# EAGLE board usbbdm_v3-1 (EAGLE 5.06)
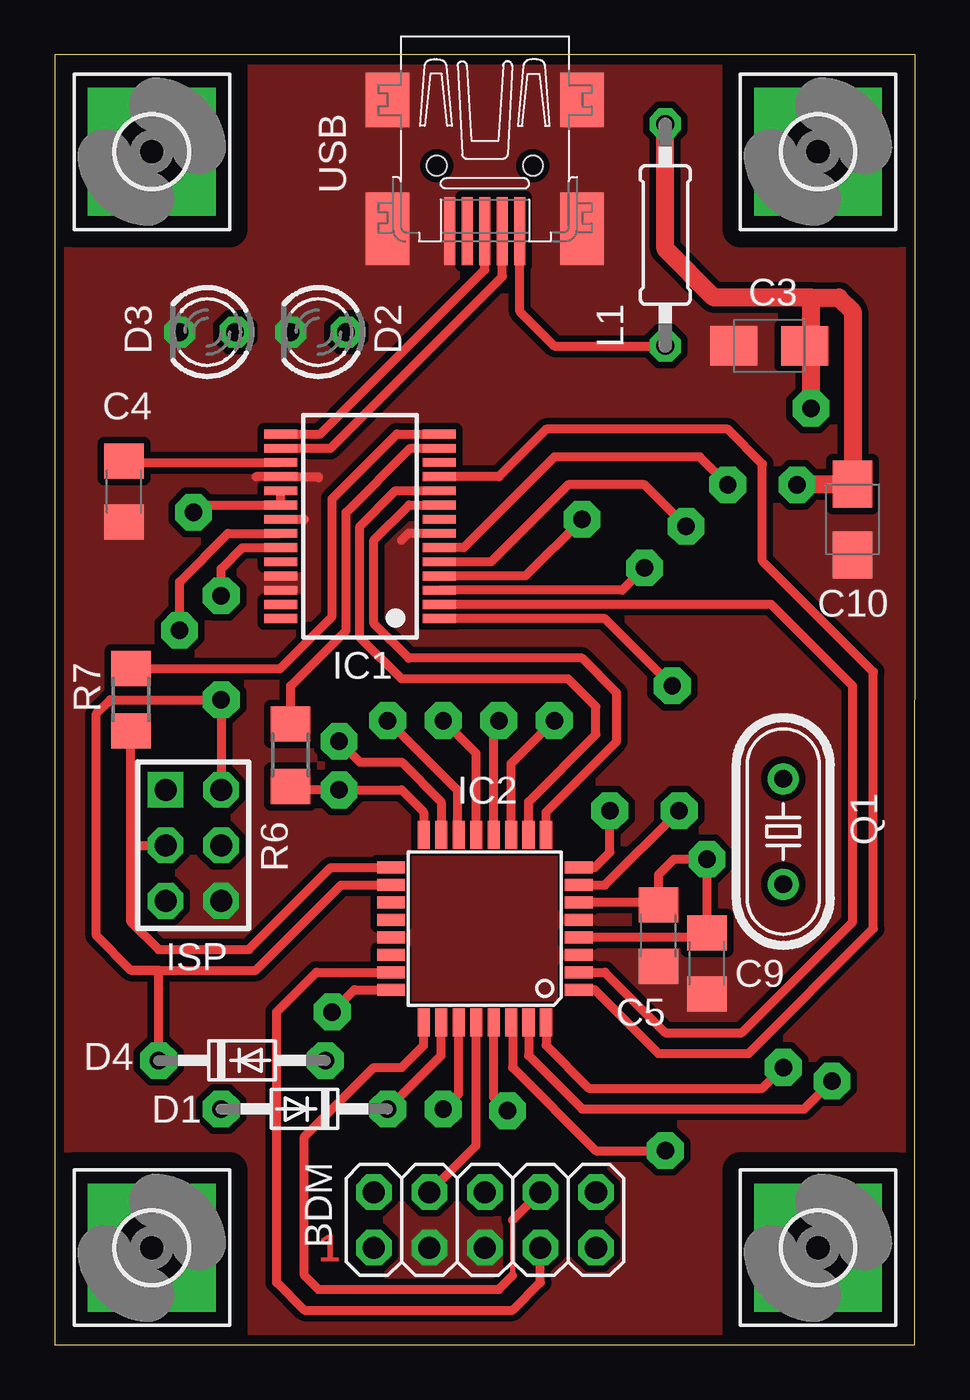
[diagram p0: board, top side]
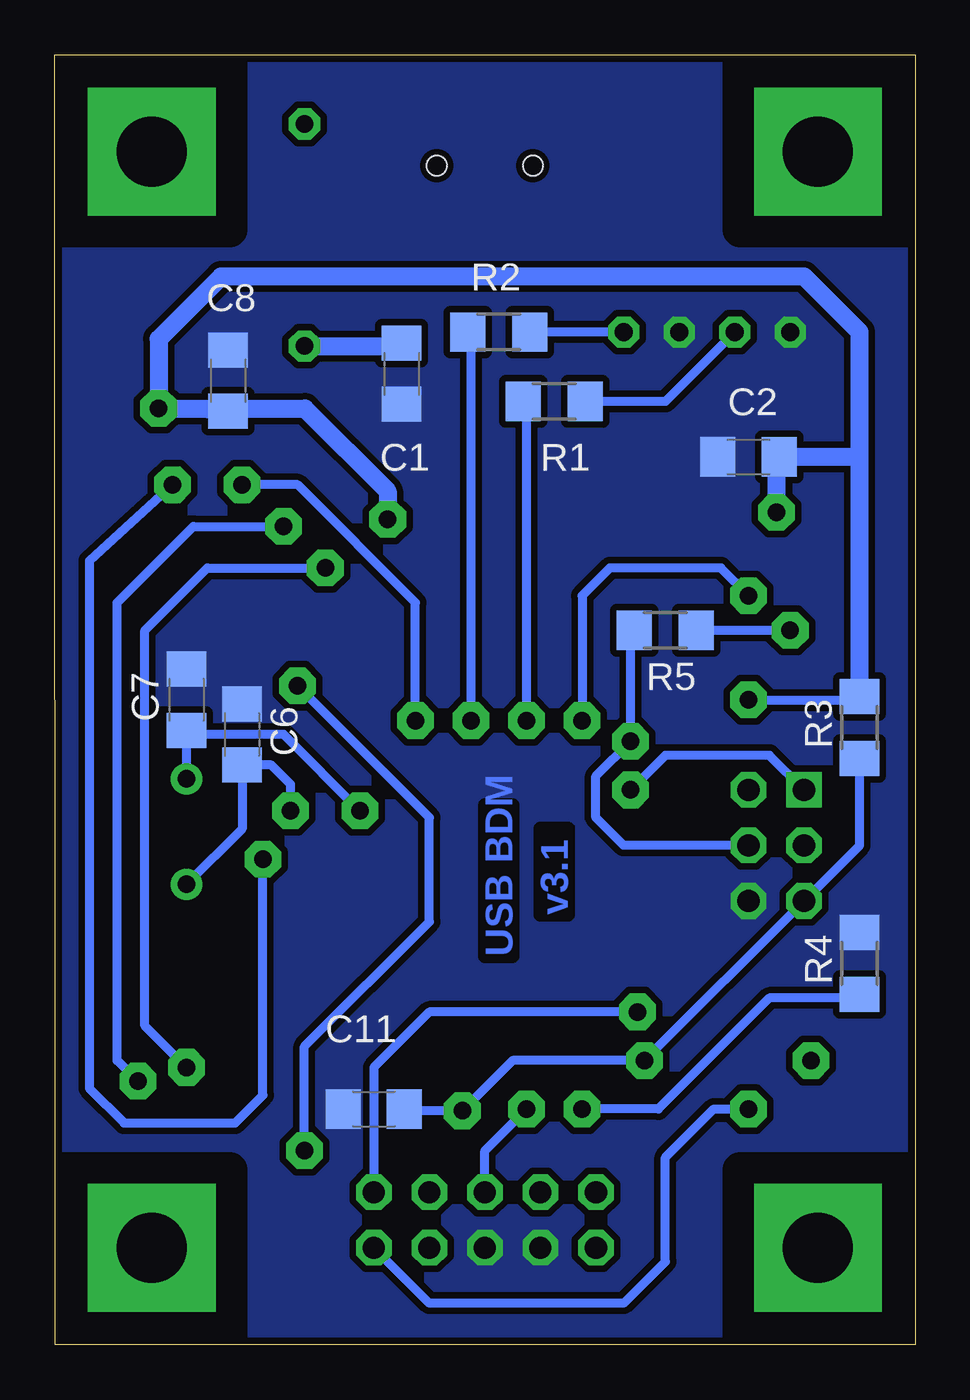
[diagram p1: board, bottom side, seen from below]

Size 39.37 x 59.05 mm. Coordinates in mm from the lower left corner, seen from the top.
Outline: 0,0 39.35,0 39.37,59.05 0,59.05 0,0
Copper layers (1*16): Top 0.035mm / dielectric 1.5mm / Bottom 0.035mm
Design rules "SparkFun": minimum track width 8mil, minimum drill 20mil, track to track 8mil, track to pad 8mil, pad to pad 8mil, via to via 8mil, smd to smd 8mil, copper to edge 10mil, drill to drill 8mil, minimum pad ring 12mil, minimum via ring 10mil, stop-mask expansion 4mil, vias tented up to drill 25mil, thermal gap 10mil

## Footprints (pad centres in the part's own frame; a part is rotated, then mirrored left to right if it is on the bottom)
C1206 = smd 1.6 x 1.8: 1 -1.4,0; 2 1.4,0
B/3528-21W = smd 2.15 x 1.8: + 1.625,0; - -1.625,0
32005-201 = smd 3.1 x 0.5: 1 3,1.6; 2 3,0.8; 3 3,0; 4 3,-0.8; 5 3,-1.6 | smd 2.5 x 2: M1 -3,-4.45; M2 -3,4.45 | smd 3.3 x 2: M3 2.9,4.45; M4 2.9,-4.45 | hole 0.9: 0,2.2; 0,-2.2
2X05 = drill 1.016 octagon: 1 -5.08,-1.27; 2 -5.08,1.27; 3 -2.54,-1.27; 4 -2.54,1.27; 5 0,-1.27; 6 0,1.27; 7 2.54,-1.27; 8 2.54,1.27; 9 5.08,-1.27; 10 5.08,1.27
AVR-ISP-6 = drill 1.016 square: 1 -2.54,-1.27 | drill 1.016 octagon: 2 -2.54,1.27; 3 0,-1.27; 4 0,1.27; 5 2.54,-1.27; 6 2.54,1.27
DO34-7 = drill 0.8 pad 1.676 octagon: A 3.81,0; C -3.81,0
LED3MM = drill 0.813 octagon: A -1.27,0; K 1.27,0
SSOP28 = smd 0.4 x 1.5: 1 -4.225,-3.625; 2 -3.575,-3.625; 3 -2.925,-3.625; 4 -2.275,-3.625; 5 -1.625,-3.625; 6 -0.975,-3.625; 7 -0.325,-3.625; 8 0.325,-3.625; 9 0.975,-3.625; 10 1.625,-3.625; 11 2.275,-3.625; 12 2.925,-3.625; 13 3.575,-3.625; 14 4.225,-3.625; 15 4.225,3.625; 16 3.575,3.625; 17 2.925,3.625; 18 2.275,3.625; 19 1.625,3.625; 20 0.975,3.625; 21 0.325,3.625; 22 -0.325,3.625; 23 -0.975,3.625; 24 -1.625,3.625; 25 -2.275,3.625; 26 -2.925,3.625; 27 -3.575,3.625; 28 -4.225,3.625
TQFP32-08 = smd 1.27 x 0.559: 1 -4.293,2.8; 2 -4.293,2; 3 -4.293,1.2; 4 -4.293,0.4; 5 -4.293,-0.4; 6 -4.293,-1.2; 7 -4.293,-2; 8 -4.293,-2.8; 17 4.293,-2.8; 18 4.293,-2; 19 4.293,-1.2; 20 4.293,-0.4; 21 4.293,0.4; 22 4.293,1.2; 23 4.293,2; 24 4.293,2.8 | smd 0.559 x 1.27: 9 -2.8,-4.293; 10 -2,-4.293; 11 -1.2,-4.293; 12 -0.4,-4.293; 13 0.4,-4.293; 14 1.2,-4.293; 15 2,-4.293; 16 2.8,-4.293; 25 2.8,4.293; 26 2,4.293; 27 1.2,4.293; 28 0.4,4.293; 29 -0.4,4.293; 30 -1.2,4.293; 31 -2,4.293; 32 -2.8,4.293
0207/10 = drill 0.813 octagon: 1 -5.08,0; 2 5.08,0
HC49/S = drill 0.813 round: 1 -2.413,0; 2 2.413,0
R1206 = smd 1.6 x 1.803: 1 -1.422,0; 2 1.422,0
3,2-PAD-SQUARE = drill 3.2 pad 5.842 square: B3,2 0,0

## Placement (x,y rotation side)
C1  10nF  [C1206]  23.5,44.45 270 bottom
C2  100nF  [C1206]  7.62,40.64 0 bottom
C3  4.7uF  [B/3528-21W]  32.7,45.72 0 top
C4  100nF  [C1206]  3.17,39.05 90 top
C5  100nF  [C1206]  27.62,18.73 90 top
C6  22pF  [C1206]  30.8,27.94 270 bottom
C7  22pF  [C1206]  33.34,29.53 270 bottom
C8  100nF  [C1206]  31.43,44.13 270 bottom
C9  100nF  [C1206]  29.85,17.46 90 top
C10  4.7uF  [B/3528-21W]  36.51,37.78 90 top
C11  10n  [C1206]  24.77,10.79 0 bottom
CON1  USB  [32005-201]  19.69,53.98 270 top
CON2  BDM  [2X05]  19.69,5.71 0 top
CON3  ISP  [AVR-ISP-6]  6.35,22.86 270 top
D1  [DO34-7]  11.43,10.79 180 top
D2  ERR  [LED3MM]  12.06,46.35 180 top
D3  ACT  [LED3MM]  6.98,46.35 180 top
D4  [DO34-7]  8.57,13.02 0 top
IC1  FT245RL  [SSOP28]  13.97,37.47 90 top
IC2  MEGA8-AI  [TQFP32-08]  19.69,19.05 180 top
L1  4.7uH  [0207/10]  27.94,50.8 90 top
Q1  16MHz  [HC49/S]  33.34,23.5 90 top
R1  270  [R1206]  16.51,43.18 0 bottom
R2  270  [R1206]  19.05,46.35 0 bottom
R3  10K  [R1206]  2.54,28.26 90 bottom
R4  10K  [R1206]  2.54,17.46 90 bottom
R5  4K7  [R1206]  11.43,32.7 180 bottom
R6  4K7  [R1206]  10.79,26.99 270 top
R7  4K7  [R1206]  3.49,29.53 270 top
U$2  [3,2-PAD-SQUARE]  4.45,4.45 0 top
U$3  [3,2-PAD-SQUARE]  34.92,4.45 0 top
U$4  [3,2-PAD-SQUARE]  4.45,54.61 0 top
U$5  [3,2-PAD-SQUARE]  34.92,54.61 0 top

## Library data of the parts
C1-C11 L1 R1-R7 = resistor
CON1 = con-cypressindustries
CON2 = pinhead
CON3 = avr-4
D1 D4 IC1 = usb_bdm
D2 D3 = led
IC2 = atmel
Q1 = crystal
U$2-U$5 = holes

## Nets
GND: C1.2 C2.1 C3.- C4.1 C5.1 C6.1 C7.1 C8.1 C9.1 C10.- C11.1 CON1.5 CON1.M1 CON1.M2 CON1.M3 CON1.M4 CON2.3 CON2.5 CON3.6 D2.K D3.K IC1.7 IC1.18 IC1.21 IC1.25 IC1.26 IC2.3 IC2.5 IC2.21 R4.2
N$1: C4.2 IC1.17
N$2: IC2.13 R1.1
N$3: CON1.3 IC1.15
N$4: CON2.7 IC2.23
N$5: CON1.2 IC1.16
N$6: CON2.10 IC2.24
N$7: CON2.8 IC2.25
N$8: D1.C IC2.26 R4.1
N$9: CON2.6 IC2.27
N$10: C11.2 CON3.5 D4.A IC2.29 R3.1
N$11: IC1.22 R5.1
N$12: CON3.1 IC2.16 R6.2
N$13: IC2.12 R2.1
N$14: D2.A R2.2
N$15: CON2.9 D1.A
N$16: IC1.14 R7.1
N$17: CON2.4 IC2.28
N$18: C1.1 CON1.1 L1.1
N$19: IC1.1 IC2.30
N$20: IC1.5 IC2.31
N$21: C6.2 IC2.7 Q1.1
N$22: C7.2 IC2.8 Q1.2
N$23: IC1.3 IC2.32
N$24: IC1.11 IC2.1
N$25: CON3.4 IC2.15 R5.2
N$26: D3.A R1.2
N$27: IC1.2 IC2.2
N$28: IC1.9 IC2.9
N$29: IC1.10 IC2.10
N$30: IC1.6 IC2.11
N$31: IC1.23 IC2.14
N$33: IC1.13 R6.1
N$34: CON3.3 IC2.17 R7.2
VCC: C2.2 C3.+ C5.2 C8.2 C9.2 C10.+ CON3.2 D4.C IC1.4 IC1.19 IC1.20 IC2.4 IC2.6 IC2.18 L1.2 R3.2

## Tracks (layer width: path | path; a pad name or v marks a point on that pad's centre or on a via)
GND
  Top 0.406: IC1.21 11.43,37.79 11.43,37.78 | 9.21,39.74 IC1.18 12.06,39.74 12.06,39.69 | IC1.7 16.19,37.14 15.88,36.83
  pour Top (isolate 0.305, no thermals): 0.64,58.42 38.73,58.42 38.73,0.64 0.64,0.64
  pour Bottom (isolate 0.305, no thermals): 0.64,58.42 38.73,58.42 38.73,0.64 0.64,0.64
  pour Bottom (isolate 0.305, no thermals): 3.81,48.9 3.81,45.09 14.61,45.09 14.61,48.9
N$1
  Top 0.406: IC1.17 3.81,40.39 C4.2
N$2  (via drill 0.8 pad 1.68)
  Top 0.406: v17.78,28.57 19.29,27.07 IC2.13
  Bottom 0.406: v17.78,28.57 17.78,43.18
  Bottom 0.61: 17.78,43.18 R1.1
N$3
  Top 0.406: IC1.15 12.16,41.69 19.69,49.21 CON1.3
N$4
  Top 0.406: IC2.23 11.97,17.05 10.16,15.24 10.16,2.86 11.43,1.59 20.96,1.59 22.23,2.86 CON2.7
N$5
  Top 0.406: CON1.2 20.49,48.9 16.35,44.77 12.63,41.04 IC1.16
N$6  (via drill 0.8 pad 1.68)
  Top 0.406: v12.7,15.24 13.71,16.25 IC2.24
  Bottom 0.406: v12.7,15.24 22.23,15.24 24.77,12.7 CON2.10
N$7
  Top 0.254: 20.96,3.17 20.96,5.71
  Top 0.406: 20.96,5.71 CON2.8 | 20.96,3.17 20.32,2.54 12.06,2.54 11.43,3.17 11.43,9.53 14.61,12.7 15.88,12.7 16.89,13.7 IC2.25
N$8
  Top 0.406: IC2.26 17.69,13.24 D1.C
  Bottom 0.406: D1.C 11.75,10.79 6.67,15.88 2.54,15.88 R4.1
N$9  (via drill 0.8 pad 1.68)
  Top 0.406: v17.78,10.79 18.49,11.5 IC2.27
  Bottom 0.406: v17.78,10.79 19.69,8.89 CON2.6
N$10  (via drill 0.8 pad 1.68)
  Top 0.406: v20.72,10.71 20.09,11.35 IC2.29
  Bottom 0.406: R3.1 2.54,22.86 CON3.5 D4.A 18.42,13.02 v20.72,10.71 23.37,10.71 C11.2
N$11  (via drill 0.8 pad 1.68)
  Top 0.406: IC1.22 7.93,37.14 5.71,34.92 v5.71,32.7
  Bottom 0.406: v5.71,32.7 R5.1 10.16,32.7
N$12  (via drill 0.8 pad 1.68)
  Top 0.406: IC2.16 16.89,24.39 15.88,25.4 v13.02,25.4 10.79,25.4 R6.2
  Bottom 0.406: v13.02,25.4 11.43,26.99 6.67,26.99 CON3.1
N$13  (via drill 0.8 pad 1.68)
  Top 0.406: v20.32,28.57 20.09,28.18 IC2.12
  Bottom 0.406: v20.32,28.57 20.32,45.67
  Bottom 0.61: 20.32,45.67 20.27,46.35 R2.1
N$14
  Bottom 0.406: D2.A R2.2
N$15
  Bottom 0.406: D1.A 9.21,10.79 11.43,8.57 11.43,3.81 13.33,1.91 22.23,1.91 CON2.9
N$16
  Top 0.406: IC1.14 15.65,41.69 12.7,38.73 12.7,33.34 10.48,31.11 10.31,30.95 R7.1
N$17
  Top 0.406: CON2.4 19.29,9.12 IC2.28
N$18
  Top 0.406: L1.1 22.86,45.72 21.29,47.3 CON1.1
  Bottom 0.406: 23.5,45.72 C1.1
  Bottom 0.813: L1.1 23.5,45.72
N$19  (via drill 0.8 pad 1.68)
  Top 0.406: IC1.1 25.18,33.24 v28.26,30.16 | IC2.30 20.96,14.76 20.96,12.7 24.77,8.89 v27.94,8.89
  Bottom 0.406: v28.26,30.16 22.23,24.13 22.23,19.37 27.94,13.65 v27.94,8.89
N$20  (via drill 0.8 pad 1.68)
  Top 0.406: v35.56,12.06 34.29,10.79 24.13,10.79 21.69,13.24 IC2.31 | v28.89,37.47 26.99,39.37 23.5,39.37 19.96,35.84 IC1.5
  Bottom 0.406: v28.89,37.47 33.02,37.47 36.51,33.97 36.51,13.02 v35.56,12.06
N$21  (via drill 0.8 pad 1.68)
  Top 0.406: IC2.7 25.18,21.05 v28.58,24.45
  Bottom 0.406: v28.58,24.45 28.58,25.66 29.46,26.54 C6.2 30.8,23.62 Q1.1
N$22  (via drill 0.8 pad 1.68)
  Top 0.406: IC2.8 24.71,21.85 25.4,22.54 v25.4,24.45
  Bottom 0.406: Q1.2 33.34,27.94 28.89,27.94 v25.4,24.45
  Bottom 0.61: 33.34,27.94 C7.2
N$23  (via drill 0.8 pad 1.68)
  Top 0.406: IC2.32 22.49,13.71 24.45,11.75 32.38,11.75 v33.34,12.7 | IC1.3 25.97,34.54 v26.99,35.56
  Bottom 0.406: v33.34,12.7 35.24,14.61 35.24,32.7 32.38,35.56 v26.99,35.56
N$24
  Top 0.406: IC1.11 20.32,39.74 22.49,41.91 30.8,41.91 32.38,40.32 32.38,35.88 37.46,30.8 37.46,19.05 31.75,13.34 27.62,13.34 24.71,16.25 IC2.1
N$25  (via drill 0.8 pad 1.68)
  Top 0.406: v13.02,27.62 13.97,26.67 15.88,26.67 17.69,24.86 IC2.15
  Bottom 0.406: R5.2 13.02,32.7 v13.02,27.62 14.61,26.04 14.61,24.13 13.33,22.86 CON3.4
N$26
  Bottom 0.406: D3.A 11.43,43.18 R1.2
N$27
  Top 0.406: IC2.2 25.18,17.05 27.94,14.29 31.43,14.29 36.51,19.37 36.51,30.16 32.78,33.89 IC1.2
N$28
  Top 0.406: IC1.9 16.21,38.44 14.61,36.83 14.61,33.02 16.19,31.43 24.13,31.43 25.72,29.84 25.72,27.62 22.49,24.39 IC2.9
N$29
  Top 0.406: IC1.10 15.6,39.09 13.97,37.47 13.97,32.38 15.88,30.48 23.5,30.48 24.77,29.21 24.77,27.94 21.69,24.86 IC2.10
N$30  (via drill 0.8 pad 1.68)
  Top 0.406: v30.8,39.37 29.53,40.64 22.86,40.64 18.71,36.49 IC1.6 | v22.86,28.57 20.89,26.6 IC2.11
  Bottom 0.406: v22.86,28.57 22.86,33.97 28.26,39.37 v30.8,39.37
N$31  (via drill 0.8 pad 1.68)
  Top 0.406: IC2.14 18.42,23.34 18.42,25.4 v15.24,28.57 | v7.62,34.29 7.62,35.52 8.6,36.49 IC1.23
  Bottom 0.406: v7.62,34.29 8.89,35.56 13.97,35.56 15.24,34.29 v15.24,28.57
N$33
  Top 0.406: R6.1 10.79,30.16 13.33,32.7 13.33,38.1 16.28,41.04 IC1.13
N$34
  Top 0.406: IC2.17 12.64,21.85 8.89,18.1 4.76,18.1 3.49,19.37 3.49,22.86 | 3.49,22.86 CON3.3 | 3.49,22.86 R7.2
VCC  (via drill 0.8 pad 1.68)
  Top 0.406: v24.13,37.78 21.54,35.19 IC1.4 | IC1.19 IC1.20 6.64,38.44 v6.35,38.1 | 7.72,25.4 CON3.2 v7.62,29.53 2.54,29.53 1.91,28.89 1.91,18.73 3.49,17.14 | 27.62,20.25 C5.2 | IC2.4 29.85,18.65 C9.2 v29.85,22.23 28.33,22.23 27.62,21.52 27.62,20.25 | 27.62,20.25 IC2.6 | IC2.18 13.11,21.05 9.21,17.14 3.49,17.14 | 3.49,17.14 4.76,17.14 D4.C
  Top 0.813: L1.2 27.94,50.16 30.16,47.94 34.61,47.94 | v34.61,42.86 34.61,46.04 | 34.61,46.04 C3.+ | 34.61,46.04 34.61,47.94 | 34.61,47.94 35.88,47.94 36.51,47.31 C10.+ 36.83,39.37 v33.97,39.37
  Bottom 0.406: v33.97,39.37 37.78,35.88 37.78,11.75 36.2,10.16 31.12,10.16 29.85,11.43 v29.85,22.23 | v34.61,42.86 31.75,42.55 | v7.62,29.53 2.22,29.53
  Bottom 0.61: C2.2 6.35,40.64 | 3.02,29.36 R3.2 2.22,29.53
  Bottom 0.813: 2.54,40.64 2.54,46.35 5.08,48.9 31.75,48.9 34.61,46.04 v34.61,42.86 27.92,42.86 24.13,39.07 v24.13,37.78 | 6.35,40.64 v6.35,38.1 | 2.54,40.64 C2.2 | R3.2 2.54,40.64 | 31.75,42.55 C8.2

## Text on the board
Top: 1
Bottom: v3.1 | USB BDM